# Altium PCB PCB1.PcbDoc (part 2 of 2)
Units mm, origin at the board's own origin, x right, y up, seen from the top; angles counter-clockwise.
Board outline 99.83 x 79.12 mm, 2 copper layers (Top Layer, Bottom Layer); 98 components, 101 nets, 440 pads, 74 vias.
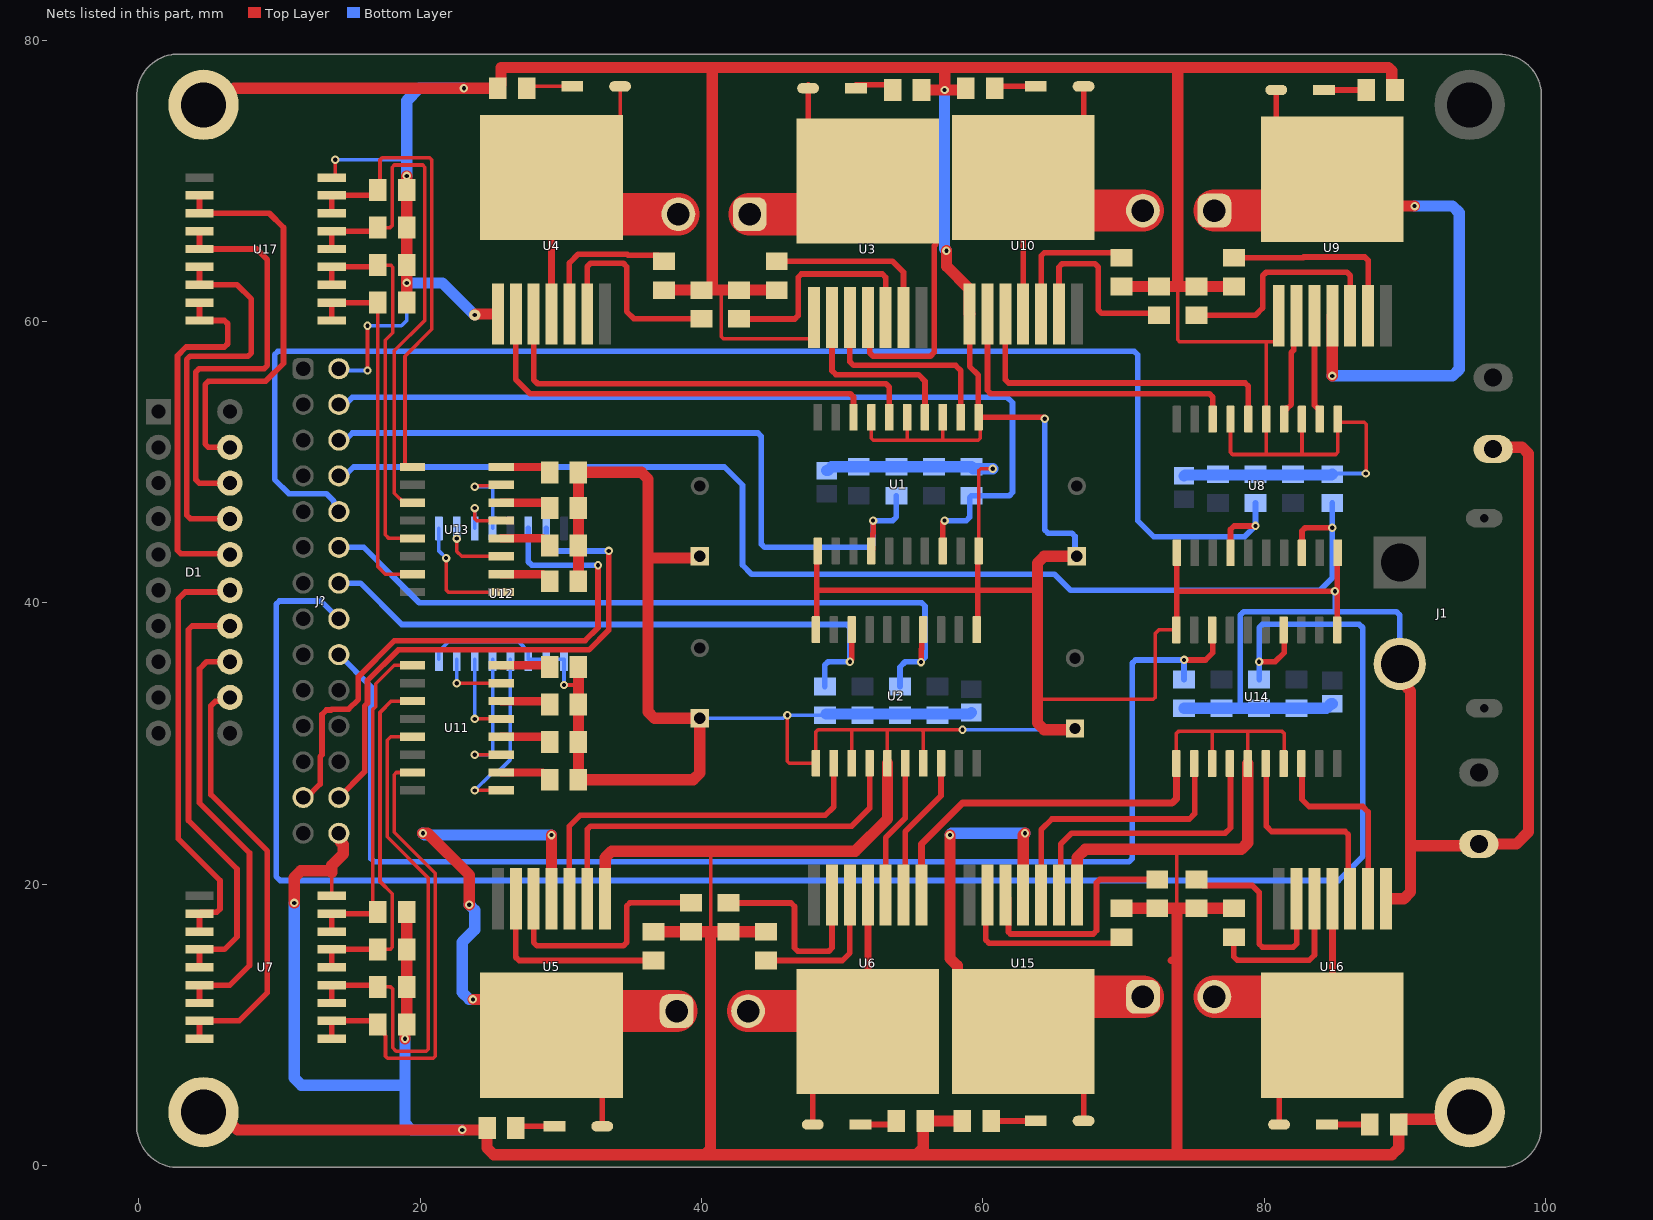
[diagram p2: the nets of this part, all layers, seen from the top]

## Via types
v1: diameter 0.6, hole 0.3, Top Layer to Bottom Layer, tented both sides, 61 vias
v2: diameter 0.8, hole 0.3, Top Layer to Bottom Layer, tented both sides, 13 vias

## Nets (pads, with @x,y where several pads share a name; then routed paths per layer and width w, separated by ;. In a path a pad name is that pad's centre, name@x,y a point inside that pad or via, vN(x,y) a via of type N, cw(c..) or ccw(c..) an arc to the next point about the centre after c; other vN are vias at no path point) (continued)
GND: C1.2 C2.2 C3.1 C4.1 C6.2 C7.1 C10.2 C11.1 H1.2 H2.2 J1.2 J?.2 J?.28 pad.3@4.6,3.8 pad.3@4.6,75.4 pad.3@94.6,3.8 R1.2 R2.2 R3.2 R4.2 R5.1 R6.1 R7.1 R8.1 R9.1 R10.1 R11.1 R12.1 R13.1 R14.1 R15.1 R16.1 R17.2 R18.2 R19.1 R20.1 R21.1 R22.1 R23.1 R24.1 R25.1 R26.1 R27.1 R28.1 R29.1 R30.1 R31.1 R32.1 R33.2 R34.2 R35.1 R36.1 R37.1 R38.1 R39.1 R40.2 R41.1 R42.2 R43.1 R44.1 R45.1 R46.1 R47.1 R48.1 R71.1 R72.2 R73.1 R74.2 R75.1 R76.2 R79.1 R80.2 U1.1 U1.10 U1.11 U1.13 U1.15 U1.17 U2.1 U2.10 U2.11 U2.13 U2.15 U2.17 U3.1 U4.1 U5.1 U6.1 U7.9 U8.1 U8.10 U8.11 U8.13 U8.15 U8.17 U9.1 U10.1 U12.1 U12.2 U12.3 U12.8 U14.1 U14.10 U14.11 U14.13 U14.15 U14.17 U15.1 U16.1 U17.9 | length 920.1
  Top Layer w0.254: U7.9@13.717,19.177 13.717,20.828 ; U17.9@13.717,70.231 13.797,70.231 13.97,70.404 v1(13.97,71.501) ; v1(16.256,56.515) v1(16.256,59.69) ; v1(30.226,34.163) 31.187,34.163 31.251,34.099 ; 39.878,28.321 40.157,28.6 ; 40.64,16.628 40.64,22.225 ; 41.402,62.23 41.402,58.928 41.551,58.779 47.708,58.779 48.006,59.077 U3.1@48.006,60.277 ; v1(46.101,32.004) 46.101,28.752 46.253,28.6 U2.11@48.133,28.6 48.133,30.839 48.282,30.988 50.747,30.988 ; U2.13@50.673,28.6 50.673,30.914 50.747,30.988 ; U1.17@52.07,53.188 52.07,51.711 52.219,51.562 54.61,51.562 ; U2.15@53.213,28.6 53.213,30.988 ; U1.15@54.61,53.188 54.61,51.562 ; U2.17@55.753,28.6 55.753,30.839 55.604,30.988 ; U1.13@57.15,53.188 57.15,51.562 ; v1(58.547,30.988) 55.604,30.988 ; U1.10@59.627,43.624 U1.10@59.69,43.688 59.69,49.381 59.839,49.53 v1(60.706,49.53) ; U1.11@59.69,53.188 59.817,53.061 59.817,51.711 59.668,51.562 57.15,51.562 ; 63.881,33.147 72.114,33.147 72.263,33.296 72.263,37.846 72.492,38.075 U14.10@73.747,38.075 ; U14.11@73.747,28.575 73.747,30.712 73.896,30.861 76.327,30.861 ; 73.787,18.288 73.787,22.352 73.914,22.479 ; 73.85,62.484 73.85,58.696 73.999,58.547 80.137,58.547 ; U14.13@76.287,28.575 76.287,30.821 76.327,30.861 ; U8.17@77.597,53.061 77.597,50.695 77.746,50.546 80.148,50.546 ; U14.15@78.827,28.575 78.827,30.827 78.793,30.861 ; U9.1@81.026,60.404 81.026,58.845 80.728,58.547 80.137,58.547 ; U14.17@81.367,28.575 81.407,28.615 81.407,30.712 81.258,30.861 78.793,30.861 ; U8.13@82.677,53.061 82.677,50.673 82.55,50.546 ; v1(87.203,49.195) 87.249,49.241 87.249,52.683 87.1,52.832 85.39,52.832 85.217,53.005 U8.11@85.217,53.061 85.217,50.695 85.068,50.546 82.55,50.546 ; 50.747,30.988 53.213,30.988 ; 53.213,30.988 55.604,30.988 ; 54.61,51.562 57.15,51.562 ; 76.327,30.861 78.793,30.861 ; 80.137,58.547 U8.15@80.137,53.061 80.137,50.557 80.148,50.546 ; 80.148,50.546 82.55,50.546
  Top Layer w0.4: U2.10@48.133,38.1 48.197,38.163 48.197,40.894 ; U1.1@48.26,43.688 48.197,43.624 48.197,40.894 ; U10.1@59.055,60.531 59.055,56.805 59.671,56.189 59.671,53.207 U1.11@59.69,53.188 64.287,53.188 v1(64.389,53.086) ; U2.1@59.563,38.1 59.627,38.163 59.627,40.894 ; U1.10@59.627,43.624 59.627,40.894 ; 63.881,40.894 59.627,40.894 ; U14.10@73.747,38.075 73.767,38.095 73.767,40.818 ; U8.1@73.787,43.561 73.767,43.541 73.767,40.818 ; v1(85.019,40.818) 73.767,40.818 ; U14.1@85.177,38.075 85.197,38.095 85.197,43.541 U8.10@85.217,43.561 ; 48.197,40.894 59.627,40.894
  Top Layer w0.5: U6.1@55.626,19.225 55.626,22.86 58.547,25.781 73.454,25.781 73.747,26.074 U14.11@73.747,28.575 ; 73.367,14.566 73.406,14.605 73.787,14.605
  Top Layer w0.8: pad.3@4.473,75.406 5.61,75.406 6.785,76.581 v1(23.114,76.581) R72.2@25.527,76.581 25.752,76.806 25.752,78.057 40.767,78.057 ; pad.3@4.6,3.819 5.737,3.819 7.015,2.54 v1(22.987,2.54) 24.629,2.54 R73.1@24.756,2.667 24.756,1.25 25.225,0.781 40.255,0.781 ; v1(11.049,18.669) 11.049,20.486 11.518,20.955 13.717,20.955 ; 13.717,20.828 13.717,20.955 ; J?.28@14.224,23.622 14.358,23.488 14.358,22.993 14.531,22.82 14.531,22.157 13.717,21.344 13.717,20.955 ; v1(18.923,9.017) 18.923,9.906 R20.1@19.05,10.033 R24.1@19.05,12.7 R27.1@19.05,15.367 R31.1@19.05,18.034 ; R36.1@19.05,61.341 v1(19.05,62.738) R46.1@19.05,69.342 v1(19.05,70.343) ; v2(23.876,60.452) 23.955,60.531 U4.1@25.527,60.531 ; R29.1@31.251,35.433 31.251,34.099 R25.1@31.251,32.766 R22.1@31.251,30.099 R19.1@31.251,27.432 39.409,27.432 39.878,27.901 39.878,28.321 C7.1@39.878,31.79 36.664,31.79 36.195,32.259 36.195,43.18 ; R35.1@31.251,41.529 R38.1@31.251,44.069 R41.1@31.251,46.736 R44.1@31.251,49.276 35.726,49.276 36.195,48.807 36.195,43.18 ; U5.1@33.147,18.971 33.147,21.883 33.616,22.352 50.927,22.352 53.213,24.638 U2.15@53.213,28.6 ; R8.1@36.576,16.628 R3.2@39.243,16.628 40.64,16.628 ; R2.2@37.338,62.23 R5.1@40.005,62.23 R5.1@40.64,62.23 ; C4.1@39.878,43.307 39.751,43.18 36.195,43.18 ; R4.2@44.577,16.628 R6.1@41.91,16.628 40.64,16.628 ; R7.1@45.339,62.23 R1.2@42.672,62.23 41.402,62.23 R5.1@40.64,62.23 ; R71.1@55.644,76.829 55.644,76.67 55.86,76.454 v1(57.277,76.454) ; v1(57.404,65.024) 57.404,63.932 59.03,62.306 59.03,60.556 U10.1@59.055,60.531 ; R79.1@58.538,3.175 R74.2@55.889,3.175 55.753,3.039 55.753,1.25 55.284,0.781 ; R76.2@58.783,76.835 58.783,76.67 58.567,76.454 v1(57.277,76.454) ; C11.1@66.548,31.068 66.468,30.988 64.35,30.988 63.881,31.457 63.881,33.147 63.881,40.894 63.881,42.838 64.35,43.307 C3.1@66.675,43.307 ; U15.1@66.675,19.225 66.7,19.25 66.7,21.908 67.271,22.479 73.914,22.479 78.358,22.479 78.827,22.948 U14.15@78.827,28.575 ; R39.1@69.85,18.288 R33.2@72.39,18.288 73.787,18.288 ; R18.2@69.85,62.484 R21.1@72.517,62.484 73.85,62.484 ; R34.2@77.851,18.288 R37.1@75.184,18.288 73.787,18.288 ; R23.1@77.851,62.484 R17.2@75.184,62.484 73.85,62.484 ; U16.1@88.646,18.971 89.919,18.971 90.388,19.44 90.388,22.733 ; R75.1@89.29,76.454 89.065,76.679 89.065,77.813 88.821,78.057 74.041,78.057 ; J1.2@89.631,35.662 90.189,35.104 90.189,33.934 90.388,33.735 90.388,22.733 ; pad.3@94.6,3.819 94.077,3.296 89.778,3.296 89.553,3.071 R80.2@89.553,2.921 89.553,1.25 89.084,0.781 73.787,0.781 ; H1.2@96.266,50.927 96.407,51.068 98.318,51.068 98.787,50.599 98.787,23.73 97.917,22.86 H2.2@95.25,22.86 95.123,22.733 90.388,22.733 ; 40.255,0.781 55.284,0.781 ; 40.255,0.781 40.64,1.166 40.64,16.628 ; R5.1@40.64,62.23 40.767,62.357 40.767,78.057 ; 40.767,78.057 57.287,78.057 ; 55.284,0.781 73.787,0.781 ; v1(57.277,76.454) 57.287,76.464 57.287,78.057 ; 57.287,78.057 74.041,78.057 ; 73.787,0.781 73.787,14.605 73.787,18.288 ; 73.85,62.484 73.85,77.866 74.041,78.057
  Bottom Layer w0.254: v1(13.97,71.501) 18.796,71.501 19.05,71.755 ; J?.2@14.351,56.515 v1(16.256,56.515) ; v1(16.256,59.69) 18.669,59.69 19.05,60.071 v1(19.05,62.738) ; U12.8@21.336,35.99 21.336,36.565 21.992,37.221 27.03,37.221 27.686,36.565 U12.3@27.686,35.99 U12.2@28.956,35.99 U12.1@30.226,35.99 v1(30.226,34.163) ; C7.1@39.878,31.79 45.793,31.79 46.007,32.004 v1(46.101,32.004) R16.1@48.768,32.004 R16.1@48.868,32.104 ; v1(58.547,30.988) 66.468,30.988 C11.1@66.548,31.068 ; R32.1@84.836,49.149 84.882,49.195 v1(87.203,49.195)
  Bottom Layer w0.4: v1(64.389,53.086) 64.389,45.192 64.623,44.958 66.314,44.958 66.548,44.724 66.548,43.434 C3.1@66.675,43.307 ; 78.295,32.503 78.295,39.136 78.502,39.342 ; 78.53,39.37 89.388,39.37 89.622,39.136 89.622,35.671 J1.2@89.631,35.662 ; v1(85.019,40.818) 85.057,40.78 85.057,39.604 85.252,39.41
  Bottom Layer w0.8: v1(11.049,18.669) 11.049,6.223 11.557,5.715 18.923,5.715 ; v1(18.923,9.017) 18.923,5.715 ; v1(19.05,62.738) 21.59,62.738 v2(23.876,60.452) ; v1(19.05,70.343) 19.05,71.755 19.05,75.692 19.939,76.581 v1(23.114,76.581) ; v1(22.987,2.54) 19.392,2.54 18.923,3.009 18.923,5.715 ; R16.1@48.868,32.104 59.082,32.104 C2.2@59.182,32.204 ; C1.2@48.895,49.402 48.995,49.402 49.259,49.666 R11.1@53.848,49.666 R13.1@56.515,49.666 R15.1@59.182,49.666 59.318,49.53 v1(60.706,49.53) ; v1(57.277,76.454) 57.277,65.151 v1(57.404,65.024) ; R48.1@74.295,32.503 R47.1@76.962,32.503 78.295,32.503 R45.1@79.629,32.503 R43.1@82.296,32.503 84.409,32.503 84.736,32.83 C10.2@84.836,32.83 ; C6.2@74.295,49.022 74.358,49.085 84.772,49.085 R32.1@84.836,49.149
MCU1: U11.1 U12.4 | length 12.5
  Top Layer w0.254: v1(23.876,26.67) U11.1@25.761,26.67
  Bottom Layer w0.254: v1(23.876,26.67) 25.009,27.803 25.349,27.803 26.416,28.87 U12.4@26.416,35.99
MCU2: U11.3 U12.5 | length 9.8
  Top Layer w0.254: v1(23.876,29.21) U11.3@25.761,29.21
  Bottom Layer w0.254: v1(23.876,29.21) 24.997,29.21 25.146,29.359 U12.5@25.146,35.99
MCU3: U11.5 U12.6 | length 6.1
  Top Layer w0.254: v1(23.876,31.75) U11.5@25.761,31.75
  Bottom Layer w0.254: v1(23.876,31.75) U12.6@23.876,35.99
MCU4: U11.7 U12.7 | length 4.9
  Top Layer w0.254: v1(22.606,34.29) U11.7@25.761,34.29
  Bottom Layer w0.254: v1(22.606,34.29) U12.7@22.606,35.99
MCU5: U12.9 U13.1 | length 8.6
  Top Layer w0.254: v1(21.844,43.18) 21.844,40.916 21.993,40.767 U13.1@25.761,40.767
  Bottom Layer w0.254: U12.9@21.336,45.29 21.336,43.688 v1(21.844,43.18)
MCU6: U12.10 U13.3 | length 4.9
  Top Layer w0.254: v1(22.606,44.569) 22.606,43.655 22.954,43.307 U13.3@25.761,43.307
  Bottom Layer w0.254: v1(22.606,44.569) U12.10@22.606,45.29
MCU7: U12.11 U13.5 | length 4.1
  Top Layer w0.254: v1(23.876,46.736) 23.876,45.996 24.025,45.847 U13.5@25.761,45.847
  Bottom Layer w0.254: U12.11@23.876,45.29 v1(23.876,46.736)
MCU8: U12.12 U13.7 | length 6.1
  Top Layer w0.254: v1(23.876,48.26) 23.939,48.323 25.698,48.323 U13.7@25.761,48.387
  Bottom Layer w0.254: v1(23.876,48.26) 24.997,48.26 25.146,48.111 U12.12@25.146,45.29
NetD18_1: D18.1 R71.2 | length 2.6
  Top Layer w0.4: D18.1@50.976,76.835 R71.2@53.594,76.835
NetD18_2: D18.2 P1.1 U3.4 U3.8 | length 39.8
  Top Layer w0.254: U3.8@51.816,69.977 52.319,69.977 U3.8@56.642,65.654
  Top Layer w0.4: D18.2@47.576,76.835 D18.2@47.576,76.581 47.576,74.217 U3.8@51.816,69.977 ; U3.4@51.816,60.277 51.953,60.14 51.953,57.765 52.187,57.531 56.261,57.531 56.55,57.82 56.55,65.378 56.642,65.47 U3.8@56.642,65.654
  Top Layer w3: P1.1@43.434,67.628 49.467,67.628 U3.8@51.816,69.977
NetD19_1: D19.1 R72.1 | length 3.3
  Top Layer w0.254: R72.1@27.577,76.581 27.704,76.708 D19.1@30.812,76.708
NetD19_2: D19.2 P1.2 U4.4 U4.8 | length 28.6
  Top Layer w0.254: U4.8@29.337,70.231 29.889,70.231 34.212,74.554 D19.2@34.212,76.708
  Top Layer w0.5: U4.4@29.337,60.531 U4.8@29.337,70.231
  Top Layer w3: U4.8@29.337,70.231 31.94,67.628 P1.2@38.354,67.628
NetD20_1: D20.1 R73.2 | length 2.8
  Top Layer w0.4: R73.2@26.806,2.667 26.933,2.794 D20.1@29.542,2.794
NetD20_2: D20.2 P2.1 U5.4 U5.8 | length 52.3
  Top Layer w0.4: U5.8@29.337,9.271 32.942,5.666 D20.2@32.942,2.794
  Top Layer w0.8: v1(20.193,23.622) 20.516,23.622 23.495,20.643 v1(23.495,18.542) ; v1(23.749,11.811) 26.797,11.811 U5.8@29.337,9.271 ; U5.4@29.337,18.971 v1(29.337,23.495)
  Top Layer w3: U5.8@29.337,9.271 31.051,10.985 P2.1@38.227,10.985
  Bottom Layer w0.8: v1(20.193,23.622) 20.32,23.495 v1(29.337,23.495) ; v1(23.495,18.542) 23.876,18.161 23.876,16.764 22.987,15.875 22.987,12.319 23.495,11.811 v1(23.749,11.811)
NetD21_1: D21.1 R74.1 | length 2.6
  Top Layer w0.4: D21.1@51.308,2.921 53.585,2.921 R74.1@53.839,3.175
NetD21_2: D21.2 P2.2 U6.4 U6.8 | length 27
  Top Layer w0.4: D21.2@47.907,2.921 47.907,5.616 U6.8@51.816,9.525
  Top Layer w0.5: U6.8@51.816,9.525 U6.4@51.816,19.225
  Top Layer w3: P2.2@43.307,10.985 50.356,10.985 U6.8@51.816,9.525
NetD22_1: D22.1 R75.2 | length 3
  Top Layer w0.4: D22.1@84.25,76.454 R75.2@87.24,76.454
NetD22_2: D22.2 P3.1 U9.4 U9.8 | length 51.9
  Top Layer w0.4: D22.2@80.85,76.454 80.85,74.09 U9.8@84.836,70.104
  Top Layer w0.8: v1(84.836,56.134) U9.4@84.836,60.404 ; U9.8@84.836,70.104 86.741,68.199 v1(90.678,68.199)
  Top Layer w3: P3.1@76.454,67.882 82.614,67.882 U9.8@84.836,70.104
  Bottom Layer w0.8: v1(84.836,56.134) 93.384,56.134 93.853,56.603 93.853,67.73 93.384,68.199 v1(90.678,68.199)
NetD23_1: D23.1 R76.1 | length 3
  Top Layer w0.4: R76.1@60.833,76.835 60.96,76.708 D23.1@63.754,76.708
NetD23_2: D23.2 P3.2 U10.4 U10.8 | length 27.5
  Top Layer w0.4: U10.4@62.865,60.531 U10.8@62.865,70.231 62.905,70.231 67.155,74.481 D23.2@67.155,76.708
  Top Layer w3: U10.8@62.865,70.231 65.214,67.882 P3.2@71.374,67.882
NetD26_1: D26.1 R79.2 | length 3.2
  Top Layer w0.4: R79.2@60.588,3.175 D26.1@63.754,3.175
NetD26_2: D26.2 P5.1 U15.4 U15.8 | length 44
  Top Layer w0.4: U15.8@62.865,9.525 62.905,9.525 67.155,5.275 D26.2@67.155,3.175
  Top Layer w0.8: v1(57.658,23.495) 57.658,14.732 58.19,14.2 58.19,13.575 62.24,9.525 U15.8@62.865,9.525 ; U15.4@62.865,19.225 62.865,23.495 v1(62.992,23.622)
  Top Layer w3: U15.8@62.865,9.525 65.341,12.001 P5.1@71.374,12.001
  Bottom Layer w0.8: v1(57.658,23.495) 57.785,23.622 v1(62.992,23.622)
NetD27_1: D27.1 R80.1 | length 3
  Top Layer w0.4: D27.1@84.455,2.921 R80.1@87.503,2.921
NetD27_2: D27.2 P5.2 U16.4 U16.8 | length 27.1
  Top Layer w0.4: D27.2@81.054,2.921 81.054,5.489 U16.8@84.836,9.271
  Top Layer w0.5: U16.8@84.836,9.271 U16.4@84.836,18.971
  Top Layer w3: P5.2@76.454,12.001 82.106,12.001 U16.8@84.836,9.271
NetR1_1: R1.1 U3.5 | length 16.3
  Top Layer w0.4: R1.1@42.672,60.18 46.629,60.18 46.863,60.414 46.863,63.139 47.097,63.373 52.852,63.373 53.086,63.139 U3.5@53.086,60.277
NetR2_1: R2.1 U4.5 | length 10.8
  Top Layer w0.4: U4.5@30.607,60.531 30.607,64.155 31.241,64.789 34.708,64.789 34.792,64.705 36.913,64.705 R2.1@37.338,64.28
NetR3_1: R3.1 U5.5 | length 17.2
  Top Layer w0.4: U5.5@28.067,18.971 28.067,15.855 28.301,15.621 34.437,15.621 34.671,15.855 34.671,18.444 34.905,18.678 R3.1@39.243,18.678
NetR4_1: R4.1 U6.5 | length 10.3
  Top Layer w0.4: R4.1@44.577,14.578 50.011,14.578 50.546,15.113 U6.5@50.546,19.225
NetR5_2: R5.2 U4.6 | length 15.1
  Top Layer w0.4: U4.6@31.877,60.531 31.877,63.901 32.111,64.135 34.437,64.135 34.671,63.901 34.671,60.706 35.179,60.198 39.987,60.198 R5.2@40.005,60.18
NetR6_2: R6.2 U6.6 | length 14.4
  Top Layer w0.4: R6.2@41.91,18.678 41.919,18.669 46.355,18.669 46.609,18.415 46.609,15.474 46.843,15.24 49.042,15.24 49.276,15.474 U6.6@49.276,19.225
NetR7_2: R7.2 U3.6 | length 12.6
  Top Layer w0.4: R7.2@45.339,64.28 53.576,64.28 54.356,63.5 U3.6@54.356,60.277
NetR8_2: R8.2 U5.6 | length 14
  Top Layer w0.4: U5.6@26.797,18.971 26.797,14.812 27.031,14.578 R8.2@36.576,14.578
NetR17_1: R17.1 U9.5 | length 16.5
  Top Layer w0.4: R17.1@75.184,60.434 79.357,60.434 79.883,60.96 79.883,63.246 80.137,63.5 85.872,63.5 86.106,63.266 U9.5@86.106,60.404
NetR18_1: R18.1 U10.5 | length 10.1
  Top Layer w0.4: U10.5@64.135,60.531 64.135,64.663 64.369,64.897 69.487,64.897 R18.1@69.85,64.534
NetR19_2: R19.2 U11.2 | length 3.7
  Top Layer w0.254: R19.2@28.703,27.94 29.201,27.442 R19.2@29.201,27.432
  Top Layer w0.6: U11.2@25.761,27.94 R19.2@28.703,27.94
NetR21_2: R21.2 U10.6 | length 13.9
  Top Layer w0.4: U10.6@65.405,60.531 65.405,63.866 65.639,64.1 67.965,64.1 68.199,63.866 68.199,60.813 68.433,60.579 72.372,60.579 R21.2@72.517,60.434
NetR22_2: R22.2 U11.4 | length 3.6
  Top Layer w0.254: R22.2@28.82,30.48 R22.2@29.201,30.099
  Top Layer w0.6: U11.4@25.761,30.48 R22.2@28.82,30.48
NetR23_2: R23.2 U9.6 | length 13.6
  Top Layer w0.4: R23.2@77.851,64.534 82.758,64.534 82.81,64.585 87.142,64.585 87.376,64.351 U9.6@87.376,60.404
NetR25_2: R25.2 U11.6 | length 3.5
  Top Layer w0.254: R25.2@28.947,33.02 R25.2@29.201,32.766
  Top Layer w0.6: U11.6@25.761,33.02 R25.2@28.947,33.02
NetR29_2: R29.2 U11.8 | length 3.5
  Top Layer w0.254: R29.2@29.074,35.56 R29.2@29.201,35.433
  Top Layer w0.6: U11.8@25.761,35.56 R29.2@29.074,35.56
NetR33_1: R33.1 U15.5 | length 16.9
  Top Layer w0.4: U15.5@61.595,19.225 61.82,19 61.82,16.603 61.956,16.467 67.838,16.467 68.072,16.701 68.072,20.104 68.306,20.338 R33.1@72.39,20.338
NetR34_1: R34.1 U16.5 | length 11.4
  Top Layer w0.4: R34.1@77.839,16.238 77.839,14.839 78.073,14.605 83.205,14.605 83.566,14.966 U16.5@83.566,18.971
NetR35_2: R35.2 U13.2 | length 3.7
  Top Layer w0.254: R35.2@28.703,42.037 29.201,41.539 R35.2@29.201,41.529
  Top Layer w0.6: U13.2@25.761,42.037 R35.2@28.703,42.037
NetR37_2: R37.2 U16.6 | length 14.6
  Top Layer w0.4: R37.2@75.184,20.338 75.609,19.913 79.147,19.913 79.629,19.431 79.629,15.763 79.863,15.529 82.062,15.529 82.296,15.763 U16.6@82.296,18.971
NetR38_2: R38.2 U13.4 | length 3.7
  Top Layer w0.254: R38.2@28.703,44.577 29.201,44.079 R38.2@29.201,44.069
  Top Layer w0.6: U13.4@25.761,44.577 R38.2@28.703,44.577
NetR39_2: R39.2 U15.6 | length 13.2
  Top Layer w0.4: U15.6@60.325,19.225 60.198,19.098 60.198,16.047 60.432,15.813 69.425,15.813 R39.2@69.85,16.238
NetR41_2: R41.2 U13.6 | length 3.6
  Top Layer w0.254: R41.2@28.82,47.117 R41.2@29.201,46.736
  Top Layer w0.6: U13.6@25.761,47.117 R41.2@28.82,47.117
NetR44_2: R44.2 U13.8 | length 3.6
  Top Layer w0.254: R44.2@28.82,49.657 R44.2@29.201,49.276
  Top Layer w0.6: U13.8@25.761,49.657 R44.2@28.82,49.657
OUT_A1: U1.18 U4.2 | length 30.6
  Top Layer w0.4: U4.2@26.797,60.531 26.797,55.88 27.813,54.864 50.566,54.864 50.8,54.63 U1.18@50.8,53.188
OUT_A2: U1.16 U4.3 | length 32.3
  Top Layer w0.4: U4.3@28.067,60.531 28.067,55.86 28.358,55.569 53.106,55.569 53.34,55.335 U1.16@53.34,53.188
OUT_A3: U1.14 U3.2 | length 13.3
  Top Layer w0.4: U3.2@49.276,60.277 49.276,56.495 49.548,56.223 55.41,56.223 55.88,55.753 U1.14@55.88,53.188
OUT_A4: U1.12 U3.3 | length 14.6
  Top Layer w0.4: U3.3@50.546,60.277 50.546,57.14 50.809,56.877 58.058,56.877 58.42,56.515 U1.12@58.42,53.188
OUT_B1: U8.18 U10.2 | length 23.2
  Top Layer w0.4: U10.2@60.325,60.531 60.325,55.098 60.559,54.864 76.093,54.864 76.327,54.63 U8.18@76.327,53.061
OUT_B2: U8.16 U10.3 | length 24.5
  Top Layer w0.4: U10.3@61.595,60.531 61.595,55.86 61.829,55.626 78.633,55.626 78.867,55.392 U8.16@78.867,53.061
OUT_B3: U8.14 U9.2 | length 7.8
  Top Layer w0.4: U8.14@81.407,53.061 81.407,53.711 81.507,53.811 81.624,53.811 81.923,54.11 81.923,57.793 82.091,57.961 82.091,60.199 U9.2@82.296,60.404
OUT_B4: U8.12 U9.3 | length 7.5
  Top Layer w0.4: U9.3@83.566,60.404 83.566,54.045 83.8,53.811 83.847,53.811 83.947,53.711 U8.12@83.947,53.061
OUT_C1: U14.18 U16.2 | length 13.8
  Top Layer w0.4: U14.18@82.677,28.575 82.677,26.035 83.185,25.527 86.995,25.527 87.376,25.146 U16.2@87.376,18.971
OUT_C2: U14.16 U16.3 | length 15.1
  Top Layer w0.4: U14.16@80.137,28.575 80.137,24.13 80.518,23.749 85.745,23.749 85.979,23.515 85.979,19.098 U16.3@86.106,18.971
OUT_C3: U14.14 U15.2 | length 20.8
  Top Layer w0.4: U15.2@65.405,19.225 65.532,19.352 65.532,22.86 66.294,23.622 77.216,23.622 77.597,24.003 U14.14@77.597,28.575
OUT_C4: U14.12 U15.3 | length 19.6
  Top Layer w0.4: U15.3@64.135,19.225 64.135,23.876 64.897,24.638 74.676,24.638 75.057,25.019 U14.12@75.057,28.575
OUT_D1: U2.18 U6.2 | length 10.5
  Top Layer w0.4: U6.2@54.356,19.225 54.483,19.352 54.483,23.749 57.023,26.289 U2.18@57.023,28.6
OUT_D2: U2.16 U6.3 | length 10
  Top Layer w0.4: U6.3@53.086,19.225 53.086,23.303 54.483,24.7 U2.16@54.483,28.6
OUT_D3: U2.14 U5.2 | length 28.8
  Top Layer w0.4: U5.2@31.877,18.971 31.877,23.896 32.111,24.13 50.673,24.13 51.943,25.4 U2.14@51.943,28.6
OUT_D4: U2.12 U5.3 | length 27.6
  Top Layer w0.4: U5.3@30.607,18.971 30.607,24.13 31.369,24.892 48.788,24.892 49.403,25.507 U2.12@49.403,28.6
PMW_AL: J?.4 R15.2 U1.8 | length 63.2
  Top Layer w0.4: U1.8@57.15,43.688 57.15,45.72 v1(57.277,45.847)
  Bottom Layer w0.4: J?.4@14.351,53.975 14.55,53.975 15.185,54.61 61.722,54.61 62.103,54.229 62.103,47.85 61.869,47.616 R15.2@59.182,47.616 59.055,47.489 59.055,46.081 58.821,45.847 v1(57.277,45.847)
PMW_AR: J?.6 R11.2 U1.4 | length 53.2
  Top Layer w0.4: U1.4@52.07,43.688 52.17,43.788 52.17,44.92 52.197,44.947 v1(52.197,45.847)
  Bottom Layer w0.4: J?.6@14.351,51.435 14.55,51.435 15.185,52.07 44.01,52.07 44.244,51.836 44.244,44.176 44.479,43.942 51.963,43.942 52.197,44.176 v1(52.197,45.847) 53.594,45.847 53.848,46.101 R11.2@53.848,47.616
PMW_BL: J?.8 R32.2 U8.8 | length 87.2
  Top Layer w0.4: U8.8@82.677,43.561 82.677,45.105 82.911,45.339 v1(84.836,45.339)
  Bottom Layer w0.4: J?.8@14.351,48.895 14.509,48.895 15.271,49.657 41.62,49.657 42.907,48.37 42.907,42.691 43.561,42.037 65.078,42.037 66.221,40.894 83.947,40.894 84.836,41.783 v1(84.836,45.339) R32.2@84.836,47.099
PMW_BR: J?.10 R28.2 U8.4 | length 102.3
  Top Layer w0.4: U8.4@77.597,43.561 77.597,45.212 77.851,45.466 v1(79.375,45.466)
  Bottom Layer w0.4: J?.10@14.224,46.482 14.224,46.78 13.86,47.144 13.86,47.227 13.335,47.752 10.668,47.752 9.652,48.768 9.652,57.64 9.886,57.874 70.759,57.874 70.993,57.64 70.993,45.847 72.136,44.704 78.613,44.704 v1(79.375,45.466) R28.2@79.375,47.099
PMW_CL: J?.18 R48.2 U14.8 | length 92.7
  Top Layer w0.4: v1(74.295,35.941) 75.819,35.941 76.327,36.449 U14.8@76.327,38.075
  Bottom Layer w0.4: J?.18@14.224,36.322 16.51,34.036 16.51,21.824 16.744,21.59 70.378,21.59 70.612,21.824 70.612,35.707 70.846,35.941 v1(74.295,35.941) R48.2@74.295,34.553
PMW_CR: J?.16 R45.2 U14.4 | length 133.9
  Top Layer w0.4: v1(79.629,35.814) 80.772,35.814 81.407,36.449 U14.4@81.407,38.075
  Bottom Layer w0.4: J?.16@14.351,38.735 12.954,40.132 9.997,40.132 9.763,39.898 9.763,20.554 10.054,20.263 85.287,20.263 86.995,21.971 86.995,38.227 86.74,38.482 79.863,38.482 79.629,38.247 v1(79.629,35.814) R45.2@79.629,34.553
PMW_DL: J?.14 R16.2 U2.8 | length 45.8
  Top Layer w0.4: v1(50.546,35.814) 50.546,35.868 50.673,35.995 U2.8@50.673,38.1
  Bottom Layer w0.4: J?.14@14.224,41.402 15.748,41.402 18.688,38.462 50.311,38.462 50.546,38.227 v1(50.546,35.814) 49.002,35.814 48.768,35.58 R16.2@48.768,34.054
PMW_DR: J?.12 R12.2 U2.4 | length 52.9
  Top Layer w0.4: v1(55.601,35.789) 55.626,35.814 55.626,36.714 55.653,36.741 55.653,38 U2.4@55.753,38.1
  Bottom Layer w0.4: J?.12@14.224,43.942 16.002,43.942 19.939,40.005 55.646,40.005 55.88,39.771 55.88,36.122 55.601,35.843 v1(55.601,35.789) ; R12.2@54.102,34.054 54.102,35.433 54.483,35.814 v1@55.626,35.814
SCL_VAN: J?.25 U12.14 | length 41.5
  Top Layer w0.4: J?.25@11.811,26.035 12.888,27.112 12.888,29.069 13.02,29.201 13.02,32.07 13.335,32.385 13.664,32.385 13.725,32.446 14.915,32.446 15.605,33.136 15.605,34.751 18.17,37.316 31.728,37.316 32.639,38.227 v1(32.639,42.672)
  Bottom Layer w0.4: U12.14@27.686,45.29 27.686,42.926 27.94,42.672 v1(32.639,42.672)
SDA_VAN: J?.26 U12.15 | length 39.3
  Top Layer w0.4: J?.26@14.224,26.162 16.056,27.994 16.056,32.662 16.259,32.865 16.259,34.48 18.441,36.662 31.999,36.662 33.401,38.064 v1(33.401,43.688)
  Bottom Layer w0.4: U12.15@28.956,45.29 28.956,43.922 29.19,43.688 v1(33.401,43.688)
TLP1: R20.2 U7.1 U7.2 U11.15 | length 33.4
  Top Layer w0.254: R20.2@17,10.033 17.498,9.535 17.498,9.274 17.536,9.236 17.536,7.769 17.685,7.62 20.933,7.62 21.082,7.769 21.082,20.784 18.161,23.705 18.161,27.791 18.31,27.94 U11.15@19.451,27.94
  Top Layer w0.4: U7.1@13.717,9.017 U7.2@13.717,10.287 16.746,10.287 R20.2@17,10.033
TLP2: R24.2 U7.3 U7.4 U11.13 | length 37.6
  Top Layer w0.254: R24.2@17,12.7 17.895,12.7 18.044,12.551 18.044,8.372 18.288,8.128 20.425,8.128 20.574,8.277 20.574,20.447 17.653,23.368 17.653,30.226 17.907,30.48 U11.13@19.451,30.48
  Top Layer w0.4: U7.3@13.717,11.557 U7.4@13.717,12.827 16.873,12.827 R24.2@17,12.7
TLP3: R27.2 U7.5 U7.6 U11.11 | length 25.3
  Top Layer w0.254: R27.2@17,15.367 17.857,15.367 18.006,15.516 18.006,19.332 17.145,20.193 17.145,32.211 17.954,33.02 U11.11@19.451,33.02
  Top Layer w0.4: U7.5@13.717,14.097 U7.6@13.717,15.367 R27.2@17,15.367
TLP4: R31.2 U7.7 U7.8 U11.9 | length 24.1
  Top Layer w0.254: R31.2@16.51,18.034 16.637,18.161 16.637,32.421 16.84,32.624 16.84,34.239 18.161,35.56 U11.9@19.451,35.56
  Top Layer w0.4: U7.7@13.717,16.637 U7.8@13.717,17.907 16.51,17.907 16.873,17.907 R31.2@17,18.034
TLP5: R36.2 U13.15 U17.1 U17.2 | length 26
  Top Layer w0.254: R36.2@17,61.341 17,42.563 17.526,42.037 U13.15@19.451,42.037
  Top Layer w0.4: U17.1@13.717,60.071 U17.2@13.717,61.341 R36.2@17,61.341
TLP6: R40.1 U13.13 U17.3 U17.4 | length 26.8
  Top Layer w0.254: R40.1@17,64.008 17.895,64.008 18.044,63.859 18.044,59.192 17.526,58.674 17.526,44.831 17.78,44.577 U13.13@19.451,44.577
  Top Layer w0.4: U17.3@13.717,62.611 U17.4@13.717,63.881 R40.1@16.873,63.881
TLP7: R42.1 U13.11 U17.5 U17.6 | length 37.9
  Top Layer w0.254: R42.1@17,66.675 17.862,66.675 18.011,66.824 18.011,70.97 18.161,71.12 18.707,71.12 18.711,71.124 19.389,71.124 19.393,71.12 20.171,71.12 20.32,70.971 20.32,60.071 18.17,57.921 18.17,47.793 18.846,47.117 U13.11@19.451,47.117
  Top Layer w0.4: U17.5@13.717,65.151 U17.6@13.717,66.421 16.746,66.421 R42.1@17,66.675
TLP8: R46.2 U13.9 U17.7 U17.8 | length 33.8
  Top Layer w0.254: R46.2@17,69.342 17.145,69.487 17.145,71.483 17.294,71.632 20.679,71.632 20.828,71.483 20.828,59.436 18.923,57.531 18.923,50.185 ; 18.924,50.184 18.924,49.825 19.092,49.657 U13.9@19.451,49.657
  Top Layer w0.4: U17.7@13.717,67.691 U17.8@13.717,68.961 16.619,68.961 R46.2@17,69.342
V1: D1.12 U7.17 U7.18 | length 30.6
  Top Layer w0.4: U7.18@4.317,9.017 U7.17@4.317,10.287 7.132,10.287 7.366,10.521 ; D1.12@6.477,33.274 6.209,33.006 5.447,33.006 5.123,32.682 5.123,26.373 9.144,22.352 9.144,12.299 7.366,10.521
V2: D1.13 U7.15 U7.16 | length 30.3
  Top Layer w0.4: U7.16@4.317,11.557 U7.15@4.317,12.827 6.477,12.827 7.874,14.224 7.874,22.225 4.318,25.781 4.318,35.306 4.826,35.814 D1.13@6.477,35.814
V3: D1.14 U7.13 U7.14 | length 30.6
  Top Layer w0.4: U7.14@4.317,14.097 U7.13@4.317,15.367 6.096,15.367 6.985,16.256 6.985,21.082 3.537,24.53 3.537,38.101 3.79,38.354 D1.14@6.477,38.354
V4: D1.15 U7.11 U7.12 | length 30.1
  Top Layer w0.4: U7.12@4.317,16.637 U7.11@4.317,17.907 4.417,18.007 5.537,18.007 5.771,18.241 5.771,20.264 2.794,23.241 2.794,40.259 3.304,40.769 6.352,40.769 D1.15@6.477,40.894
V5: D1.16 U17.17 U17.18 | length 26.4
  Top Layer w0.4: U17.17@4.317,61.341 U17.18@4.317,60.071 6.085,60.071 6.32,59.837 6.32,58.419 6.085,58.185 3.368,58.185 2.751,57.568 2.751,43.73 2.985,43.495 6.416,43.495 D1.16@6.477,43.434
V6: D1.17 U17.15 U17.16 | length 28.2
  Top Layer w0.4: U17.15@4.317,63.881 U17.16@4.317,62.611 6.985,62.611 8.001,61.595 8.001,57.765 7.767,57.531 3.639,57.531 3.405,57.297 3.405,46.232 3.663,45.974 D1.17@6.477,45.974
V7: D1.18 U17.13 U17.14 | length 29.4
  Top Layer w0.4: U17.13@4.317,66.421 U17.14@4.317,65.151 8.382,65.151 9.144,64.389 9.144,56.876 8.91,56.642 4.293,56.642 4.059,56.408 4.059,48.748 4.293,48.514 D1.18@6.477,48.514
V8: D1.19 U17.11 U17.12 | length 29.6
  Top Layer w0.4: U17.11@4.317,68.961 U17.12@4.317,67.691 9.271,67.691 10.287,66.675 10.287,57.023 9.017,55.753 4.947,55.753 4.713,55.519 4.713,51.288 4.947,51.054 D1.19@6.477,51.054
pads on no net: D1.1 D1.2 D1.3 D1.4 D1.5 D1.6 D1.7 D1.8 D1.9 D1.10 D1.11 D1.20 J1.SH1 J1.SH2 J?.19 J?.20 J?.21 J?.22 J?.23 J?.24 U1.3 U1.5 U1.7 U1.9 U2.3 U2.5 U2.7 U2.9 U8.3 U8.5 U8.7 U8.9 U12.13 U14.3 U14.5 U14.7 U14.9

## Polygon pours and split planes (outlines as drawn)
+12 on Top Layer "+12_L01_P000" (solid, remove dead copper, pour order 0): 97.469,59.376 98.679,58.166 98.679,55.118 98.298,54.737 93.472,54.737 92.329,53.594 92.329,44.323 92.964,43.688 94.996,43.688 96.139,42.545 96.139,33.274 94.742,33.274 94.234,32.766 94.234,32.131 94.742,31.623 95.758,31.623 95.758,29.337 95.885,29.21 96.647,29.21 97.028,28.829 97.028,27.051 96.774,26.797 93.853,26.797 93.218,27.432 93.218,40.386 92.837,40.767 87.503,40.767 87.376,40.894 87.376,45.085 87.376,45.212 88.011,45.847 88.138,45.974 88.138,46.228 88.138,64.643 88.265,64.77 91.186,64.77 91.694,64.262 91.694,59.532
GND on Top Layer "GND_L01_P001" (solid, remove dead copper, pour order 1): 94.234,52.07 94.615,52.451 99.187,52.451 99.441,52.197 99.441,17.018 97.155,14.732 88.138,14.732 88.138,21.336 88.519,21.717 88.519,33.655 87.503,34.671 87.503,37.592 87.884,37.973 91.186,37.973 91.821,37.338 91.821,24.892 97.282,24.892 97.409,25.019 97.409,49.149 94.488,49.149 94.234,49.403
GND on Bottom Layer "GND_L02_P008" (solid, remove dead copper, pour order 8): 9.525,18.542 10.16,19.177 11.557,19.177 12.065,18.669 12.065,7.366 12.446,6.985 16.51,6.985 17.018,7.493 17.018,9.779 17.272,10.033 19.812,10.033 20.066,9.779 20.066,3.937 20.447,3.556 23.622,3.556 23.622,3.429 24.003,3.048 24.003,1.905 23.749,1.651 18.415,1.651 17.78,2.286 17.78,4.699 17.526,4.953 10.033,4.953 9.271,5.715 9.525,5.969
GND on Bottom Layer "GND_L02_P006" (solid, remove dead copper, pour order 6): 15.621,60.071 15.621,59.436 15.875,59.182 19.05,59.182 19.431,59.563 19.431,61.849 19.558,61.976 21.336,61.976 23.495,59.817 24.511,59.817 24.765,60.071 24.765,60.452 21.59,63.627 18.542,63.627 18.161,63.246 18.161,60.579 17.78,60.198 15.748,60.198
GND on Bottom Layer "GND_L02_P005" (solid, remove dead copper, pour order 5): 13.462,70.612 13.462,72.263 13.589,72.39 17.78,72.39 18.288,72.898 18.288,76.962 18.923,77.597 23.622,77.597 24.003,77.216 24.003,75.692 23.622,75.311 20.574,75.311 20.193,74.93 20.193,69.85 19.812,69.469 18.542,69.469 18.034,69.977 18.034,70.485
+12 on Bottom Layer "+12_L02_P003" (solid, remove dead copper, pour order 3): 22.479,65.087 22.479,63.881 22.733,63.627 26.289,60.071 91.186,60.071 91.694,60.579 91.694,64.262 91.186,64.77 59.055,64.77 58.166,63.881 56.848,63.881 55.965,64.891
+12 on Bottom Layer "+12_L02_P002" (solid, remove dead copper, pour order 2): 26.229,18.355 24.765,16.891 24.765,14.859 25.4,14.224 98.975,14.224 99.695,16.384 99.695,41.91 97.282,44.323 92.583,44.323 91.313,45.593 87.63,45.593 87.122,45.085 87.122,41.021 87.884,40.259 91.821,40.259 91.821,40.386 92.583,41.148 95.631,41.148 96.012,40.767 96.012,30.48 95.504,29.972 93.345,29.972 92.456,29.083 92.456,26.924 93.599,25.781 97.028,25.781 97.028,25.654 97.282,25.4 97.282,20.193 95.825,18.736

## Keep-outs
Keep-Out Layer:
  lines w0.254: 0,2.413 0,75.946 cw(c2.794,76.073) 2.667,78.867 ; 0,2.667 ccw(c2.794,2.794) 2.921,0 96.901,0 ccw(c96.774,2.794) 99.568,2.921 ; 2.413,78.867 96.647,78.867 cw(c96.774,76.073) 99.568,76.2 99.568,2.413

## Silkscreen, mask and mechanical layers (free items; w line width, h text height)
Top Overlay:
  circle w0.3: c4.6,3.819 r2.868
  circle w0.3: c94.6,3.819 r2.813
  circle w0.3: c94.6,75.4 r2.876
  circle w0.3: c4.473,75.406 r2.813
  text "GND - 24V" at 99.036,60.452 h2 r90
  text "GND - 24V" at 98.679,9.652 h2 r90
Bottom Overlay:
  drawing of 55 lines, arcs and shapes, not listed